# EAGLE board Project_5 (EAGLE 9.6.2)
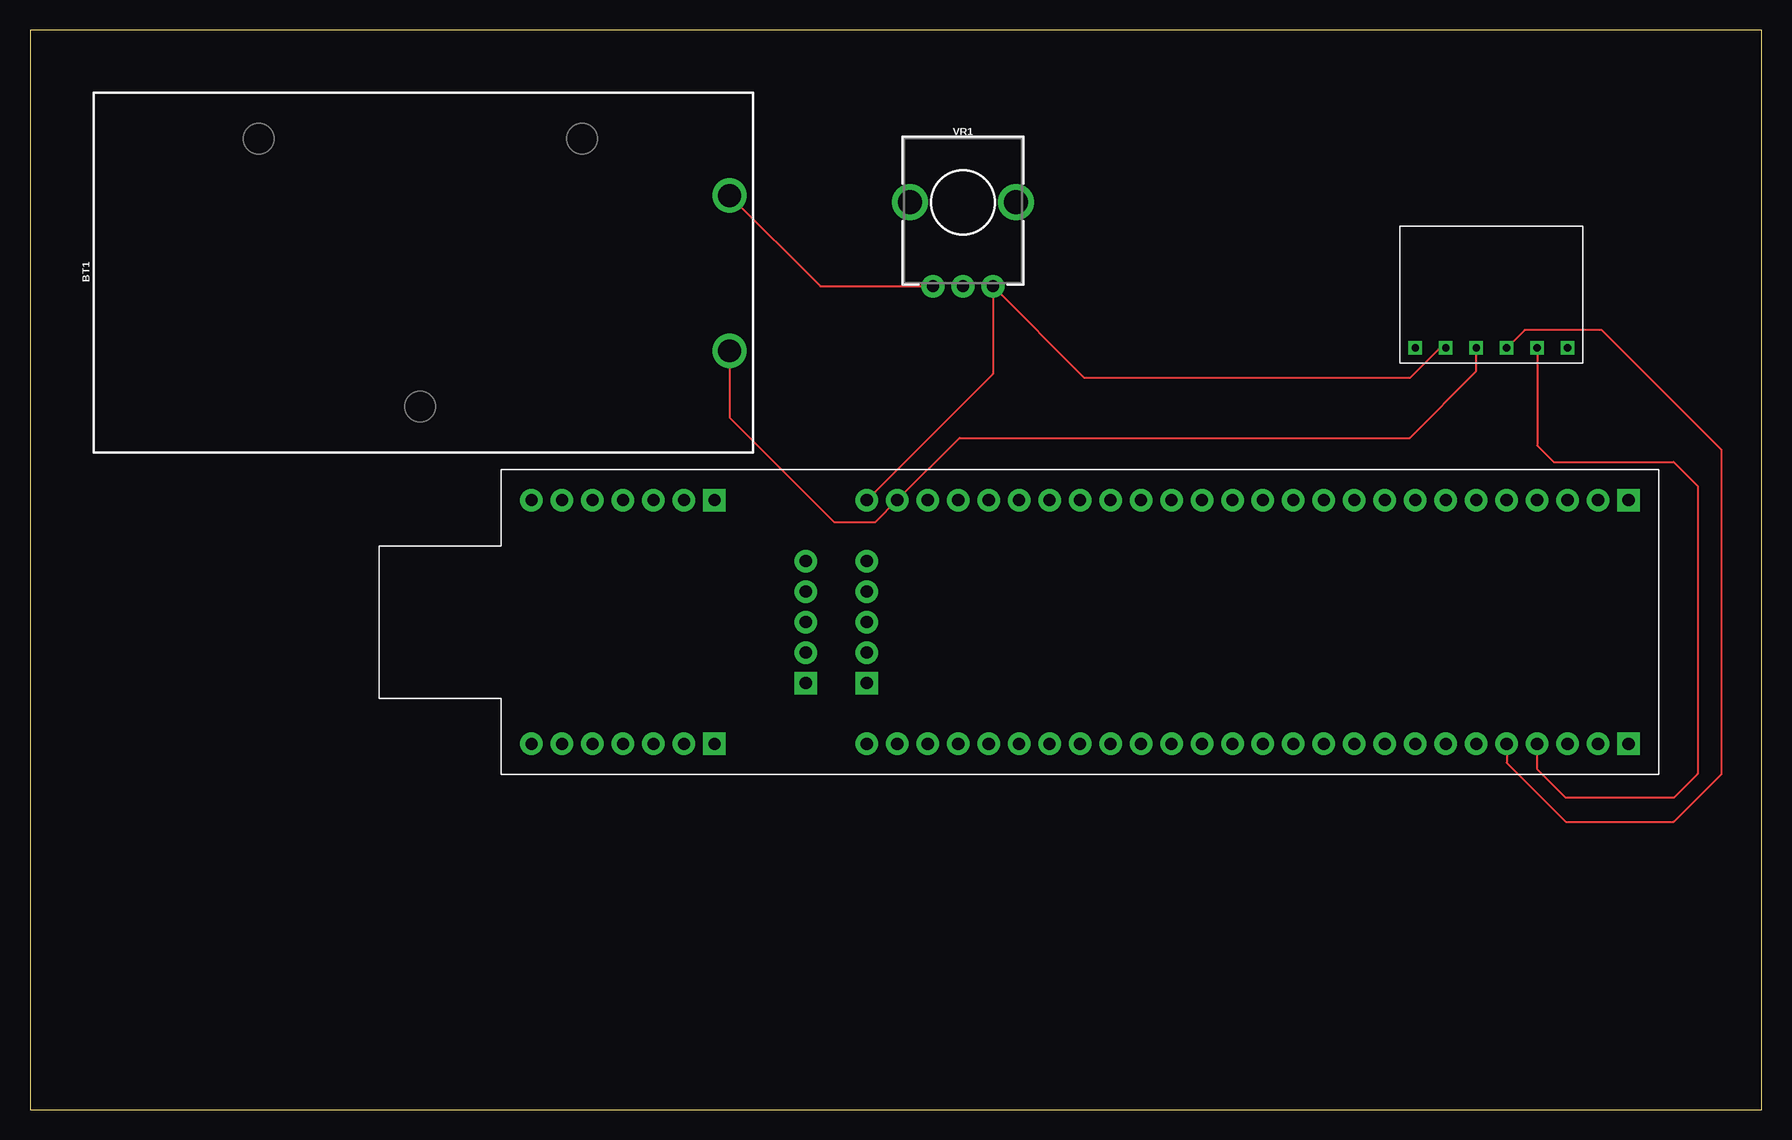
[diagram p0: board, top side]

Size 144.35 x 90 mm. Coordinates in mm from the lower left corner, seen from the top.
Outline: 0,0 144.35,0 144.35,90 0,90 0,0
Copper layers (1*16): Top 0.035mm / dielectric 1.5mm / Bottom 0.035mm
Design rules "default": minimum track width 6mil, minimum drill 0.35mm, track to track 6mil, track to pad 6mil, pad to pad 6mil, via to via 6mil, smd to smd 6mil, copper to edge 40mil, drill to drill 6mil, minimum pad ring 10mil, minimum via ring 8mil, stop-mask expansion 4mil, vias tented up to drill 0mil, thermal gap 10mil

## Footprints (pad centres in the part's own frame; a part is rotated, then mirrored left to right if it is on the bottom)
BATTCON_9V = drill 1.905: + 0,0; - 0,-12.954
CY8CKIT-059 = drill 1.016 pad 1.876 square: 1 30.48,8.89; 27 30.48,-11.43; 53 -45.72,8.89; 60 -45.72,-11.43; 71 -33.02,-6.35; 76 -38.1,-6.35 | drill 1.016 pad 1.876: 2 27.94,8.89; 3 25.4,8.89; 4 22.86,8.89; 5 20.32,8.89; 6 17.78,8.89; 7 15.24,8.89; 8 12.7,8.89; 9 10.16,8.89; 10 7.62,8.89; 11 5.08,8.89; 12 2.54,8.89; 13 0,8.89; 14 -2.54,8.89; 15 -5.08,8.89; 16 -7.62,8.89; 17 -10.16,8.89; 18 -12.7,8.89; 19 -15.24,8.89; 20 -17.78,8.89; 21 -20.32,8.89; 22 -22.86,8.89; 23 -25.4,8.89; 24 -27.94,8.89; 25 -30.48,8.89; 26 -33.02,8.89; 28 27.94,-11.43; 29 25.4,-11.43; 30 22.86,-11.43; 31 20.32,-11.43; 32 17.78,-11.43; 33 15.24,-11.43; 34 12.7,-11.43; 35 10.16,-11.43; 36 7.62,-11.43; 37 5.08,-11.43; 38 2.54,-11.43; 39 0,-11.43; 40 -2.54,-11.43; 41 -5.08,-11.43; 42 -7.62,-11.43; 43 -10.16,-11.43; 44 -12.7,-11.43; 45 -15.24,-11.43; 46 -17.78,-11.43; 47 -20.32,-11.43; 48 -22.86,-11.43; 49 -25.4,-11.43; 50 -27.94,-11.43; 51 -30.48,-11.43; 52 -33.02,-11.43; 54 -48.26,8.89; 55 -50.8,8.89; 56 -53.34,8.89; 57 -55.88,8.89; 58 -58.42,8.89; 59 -60.96,8.89; 61 -48.26,-11.43; 62 -50.8,-11.43; 63 -53.34,-11.43; 64 -55.88,-11.43; 65 -58.42,-11.43; 66 -60.96,-11.43; 67 -33.02,3.81; 68 -33.02,1.27; 69 -33.02,-1.27; 70 -33.02,-3.81; 72 -38.1,3.81; 73 -38.1,1.27; 74 -38.1,-1.27; 75 -38.1,-3.81
HC-05 = drill 0.6 square: P$1 0,0; P$2 2.54,0; P$3 5.08,0; P$4 7.62,0; P$5 10.16,0; P$6 12.7,0
POT-PTH-ALPS-KIT = drill 1 pad 1.88: P$1 7,-2.5; P$2 7,0; P$3 7,2.5 | drill 2: P$4 0,-4.4; P$5 0,4.4

## Placement (x,y rotation side)
BT1  [BATTCON_9V]  58.32,76.2 0 top
U$1  CY8CKIT-059  [CY8CKIT-059]  102.77,41.91 0 top
U$2  HC  [HC-05]  128.17,63.5 180 top
VR1  10k  [POT-PTH-ALPS-KIT]  77.77,75.63 270 top

## Library data of the parts
BT1 = SparkFun-Batteries; PROD_ID: BATT-10855
U$1 = CYKIT
U$2 = hc-05
VR1 = SparkFun-Resistors; PROD_ID: RES-09177; SF_SKU: COM-09288

## Nets
N$2: BT1.- U$1.25 U$2.P$4
N$3: U$1.30 U$2.P$2
N$4: U$1.31 U$2.P$3
N$5: U$1.26 U$2.P$5 VR1.P$3
N$6: BT1.+ VR1.P$1

## Tracks (layer width: path | path; a pad name or v marks a point on that pad's centre or on a via)
N$2
  Top 0.152: BT1.- 58.32,57.68 67,49 70.49,49 U$1.25 77.49,56 115,56 120.55,61.55 U$2.P$4
N$3
  Top 0.152: U$2.P$2 125.63,55.37 127,54 137,54 139,52 139,28 137,26 128,26 125.63,28.37 U$1.30
N$4
  Top 0.152: U$1.31 123.09,28.91 128,24 137,24 141,28 141,55 131,65 124.59,65 U$2.P$3
N$5
  Top 0.152: U$2.P$5 117.5,63.5 115,61 87.9,61 VR1.P$3 80.27,61.32 U$1.26
N$6
  Top 0.152: BT1.+ 65.89,68.63 VR1.P$1